# Altium PCB 2S3P-9V.PcbDoc
Units mm, origin at the board's own origin, x right, y up, seen from the top; angles counter-clockwise.
Board outline 74.99 x 72.5 mm, 2 copper layers (Top Layer, Bottom Layer); 8 components, 8 nets, 48 pads, 0 vias.
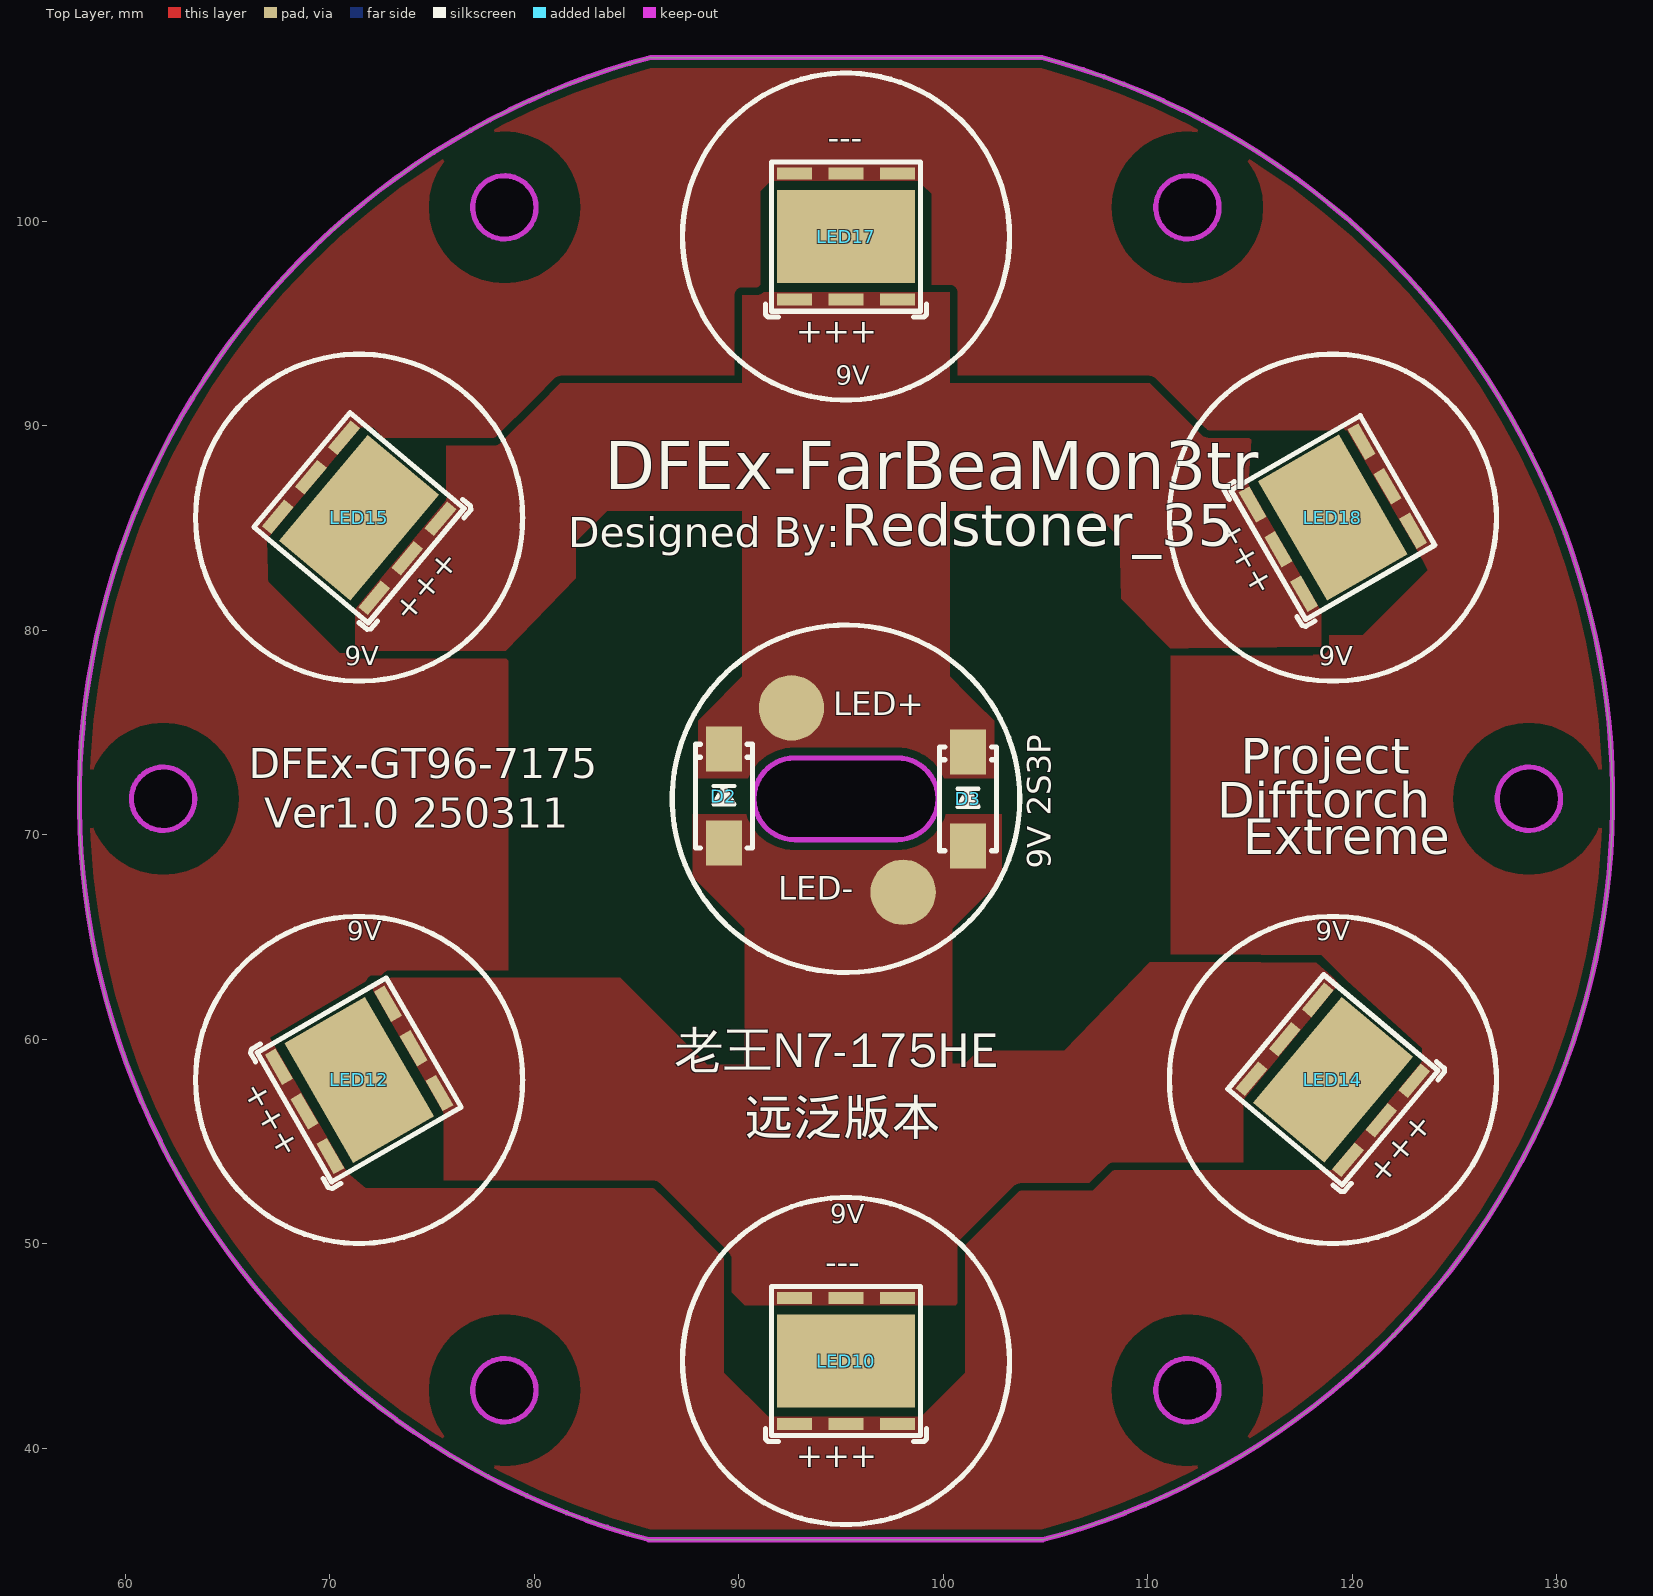
[diagram p0: Top Layer view]
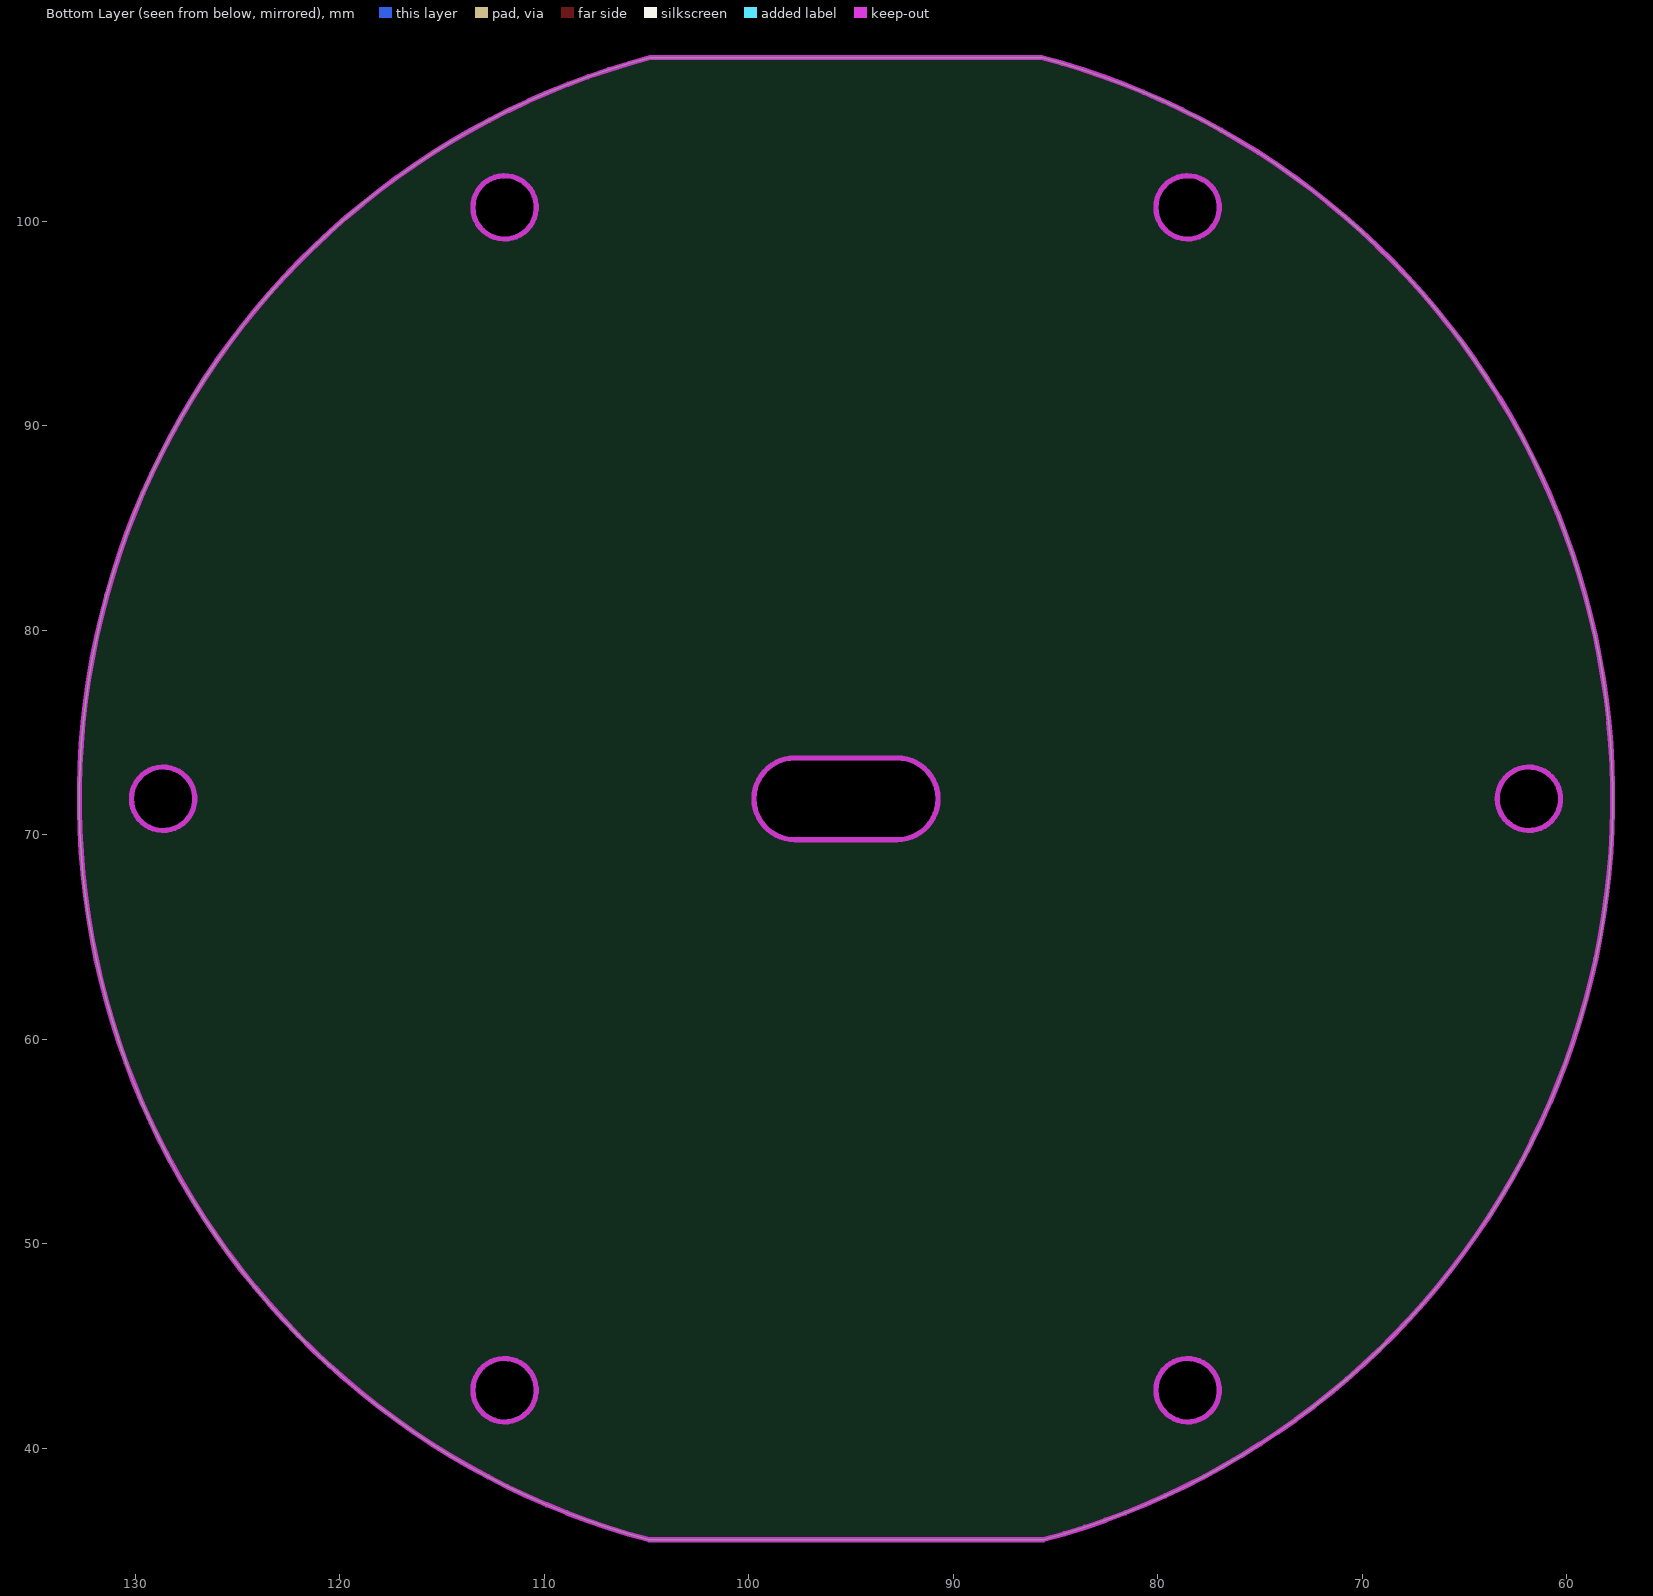
[diagram p1: Bottom Layer view, seen from below]

## Layer stack, top to bottom
Top Solder: solder mask 0.0102, Solder Resist, Dk 3.5
Top Layer: signal copper 0.0356
Dielectric 1: dielectric 0.32, FR-4, Dk 4.8
Bottom Layer: signal copper 0.0356
Bottom Solder: solder mask 0.0102, Solder Resist, Dk 3.5

## Board outline
85.597,35.519 cw(c95.25,71.755) 85.7,108.019 85.7,108.01 104.832,108.01 cw(c95.25,71.755) 104.888,35.515
cut-out: 92.75,69.755 97.75,69.755 ccw(c97.75,71.755) 97.75,73.755 92.75,73.755 ccw(c92.75,71.755)
cut-out: 61.848,70.205 cw(c61.848,71.755) 60.298,71.755 cw(c61.848,71.755) 61.848,73.305 cw(c61.848,71.755) 63.398,71.755 cw(c61.848,71.755)
cut-out: 78.549,99.132 cw(c78.549,100.682) 76.999,100.682 cw(c78.549,100.682) 78.549,102.232 cw(c78.549,100.682) 80.099,100.682 cw(c78.549,100.682)
cut-out: 110.401,100.682 ccw(c111.951,100.682) 111.951,99.132 ccw(c111.951,100.682) 113.501,100.682 ccw(c111.951,100.682) 111.951,102.232 ccw(c111.951,100.682)
cut-out: 127.102,71.755 ccw(c128.652,71.755) 128.652,70.205 ccw(c128.652,71.755) 130.202,71.755 ccw(c128.652,71.755) 128.652,73.305 ccw(c128.652,71.755)
cut-out: 110.401,42.828 ccw(c111.951,42.828) 111.951,41.278 ccw(c111.951,42.828) 113.501,42.828 ccw(c111.951,42.828) 111.951,44.378 ccw(c111.951,42.828)
cut-out: 76.999,42.828 cw(c78.549,42.828) 78.549,44.378 cw(c78.549,42.828) 80.099,42.828 cw(c78.549,42.828) 78.549,41.278 cw(c78.549,42.828)

## Design rules (kind name [scope] priority, off if disabled: settings)
Clearance [All] p1: gap=0.381
PolygonConnect [All] p1: connectstyle=Direct reliefconductorwidth=0.254 reliefentries=4 polygonreliefangle="90 Angle" airgapwidth=0.254
RoutingVias [All] p1: holewidth=0.711 width=1.27 viastyle="Through Hole" minholewidth=0.711 minwidth=1.27 maxholewidth=0.711 maxwidth=1.27
SolderMaskExpansion [All] p1: expansion=0.102
Width [All] p1: maxlimit=0.254 minlimit=0.254 preferedwidth=0.254
30 further rules are at their usual default settings.

## Components (designator, comment, footprint, x,y, rotation, side; value= is the part's Value field where it differs from the comment)
D2 "SB2060L" SMA 89.281,71.882 r90 top
D3 "SB2060L" SMA 101.219,71.755 r90 top
LED10 "FV7012I" N7175HE 95.25,44.255 r180 top
LED12 "FV7012I" N7175HE 71.434,58.005 r120 top
LED14 "FV7012I" N7175HE 119.066,58.005 r230 top
LED15 "FV7012I" N7175HE 71.434,85.505 r230 top
LED17 "FV7012I" N7175HE 95.25,99.255 r180 top
LED18 "FV7012I" N7175HE 119.066,85.505 r120 top

## Footprints (in the part's own frame and the unit in brackets; to place one, negate y for a bottom-side part, rotate by r counter-clockwise, add the part's x,y. Pads: shape width x height; smd on the part's side, far side on the other; paste and mask are expansions set on the pad)
N7175HE [mm] "夜巡老王N7-175HE灯珠（达立半导体A6-N60）"
  rect 6.76x4.56 smd mask+0.03: 0(0,0)
  rect 1.72x0.6 smd mask+0.03: W1N(-2.52,-3.08) W1P(-2.52,3.08) W2N(0,-3.08) W2P(0,3.08) W3N(2.52,-3.08) W3P(2.52,3.08)
  silkscreen extent -3.94,-3.65 3.94,3.94, body extent -3.68,-3.68 3.68,3.68, height 0.7
SMA [mm] "4.5x2.6*2.2mm（长宽高，不包括引脚）"
  rect 2.2x1.75 smd: 1(-2.3,0) 2(2.3,0)
  silkscreen extent -2.54,-1.4 2.54,1.4, body extent -2.53,-1.3 2.58,1.3, height 2.15

## Free pads (board coordinates)
  round 3.2 smd mask+0.03: 1(92.583,76.2) 2(98.044,67.183)

## Nets (pads, with @x,y where several pads share a name; then routed paths per layer and width w, separated by ;. In a path a pad name is that pad's centre, name@x,y a point inside that pad or via, vN(x,y) a via of type N, cw(c..) or ccw(c..) an arc to the next point about the centre after c; other vN are vias at no path point)
LED1P_6V: LED10.W1P LED10.W2P LED10.W3P LED12.W1P LED12.W2P LED12.W3P LED14.W1P LED14.W2P LED14.W3P LED15.W1N LED15.W2N LED15.W3N LED17.W1N LED17.W2N LED17.W3N LED18.W1N LED18.W2N LED18.W3N
LED1P_12V: 
LED2P_6V: 
LED2P_12V: 
LED+: D2.2 D3.2 LED15.W1P LED15.W2P LED15.W3P LED17.W1P LED17.W2P LED17.W3P LED18.W1P LED18.W2P LED18.W3P pad.1
LED-: D2.1 D3.1 LED10.W1N LED10.W2N LED10.W3N LED12.W1N LED12.W2N LED12.W3N LED14.W1N LED14.W2N LED14.W3N pad.2
NTC+: 
NTC-: 
pads on no net: LED10.0 LED12.0 LED14.0 LED15.0 LED17.0 LED18.0

## Polygon pours and split planes (outlines as drawn)
LED- on Top Layer "Component Side-No Net 1" (solid, remove dead copper, pour order 37): 87.757,70.993 102.87,70.993 102.87,67.818 100.457,65.405 92.075,65.405 90.297,65.405 87.757,67.945 87.757,69.342
LED+ on Top Layer "Component Side-No Net 1" (solid, remove dead copper, pour order 35): 98.848,74.083 98.848,72.983 98.933,72.898 99.06,72.771 102.489,72.771 102.489,75.565 101.6,76.454 99.949,78.105 97.028,78.105 90.551,78.105 88.011,75.565 88.011,72.771 98.044,72.771 98.425,73.152
LED1P_6V on Top Layer "Component Side-No Net 1" (solid, remove dead copper, pour order 16): 66.675,82.677 69.723,79.629 71.501,77.851 73.406,75.946 73.406,71.173 73.406,69.342 67.056,60.071 68.072,58.039 60.706,58.674 60.706,77.978 60.452,78.232 60.452,79.121 60.706,79.375
LED1P_6V on Top Layer "Component Side-No Net 1" (solid, remove dead copper, pour order 14): 119.761,89.789 112.395,89.789 105.791,96.393 105.664,96.52 101.219,96.52 99.822,96.52 99.441,96.901 99.441,100.965 99.441,101.346 98.806,101.981 96.901,101.981 91.567,101.981 91.186,101.6 91.059,101.473 91.059,98.425 91.059,96.901 90.551,96.393 85.598,96.393 85.344,96.393 78.359,89.408 72.898,89.408 72.644,89.408 72.136,89.916 71.501,89.916 66.929,84.455 67.056,79.629 67.056,79.502 69.723,76.835 73.406,73.152 73.406,66.802 73.406,66.294 72.517,65.405 71.882,64.77 54.864,64.77 54.864,100.711 53.975,101.6 67.437,115.062 67.437,115.443 101.727,115.443 102.743,116.459 106.68,112.522 128.397,112.522 132.461,112.522 140.97,104.013 141.986,102.997 141.986,82.042 141.986,76.073 141.732,75.819 140.843,74.93 128.905,74.93 128.143,74.93 123.317,83.693
LED1P_6V on Top Layer "Component Side-No Net 1" (solid, remove dead copper, pour order 15): 123.698,82.931 113.284,72.517 113.284,67.691 113.284,66.421 115.062,64.643 115.57,64.135 117.856,64.135 118.491,64.135 119.761,62.865 123.444,59.563 123.444,58.928 118.999,53.594 108.331,53.594 107.315,52.578 104.648,52.578 103.759,52.578 101.727,50.546 101.092,49.911 101.092,45.466 101.092,43.688 99.568,42.164 98.933,41.529 91.44,41.529 89.281,43.688 89.281,48.26 89.281,49.276 85.852,52.705 71.755,52.705 70.866,53.467 67.056,60.071 72.263,63.119 72.517,63.119 73.406,64.008 73.406,66.294 73.406,66.929 72.39,67.945 71.882,67.437 53.594,67.437 53.594,33.401 52.959,32.766 61.722,24.003 104.902,24.003 141.605,24.003 144.399,26.797 149.86,32.258 149.86,88.519
LED+ on Top Layer "Component Side-No Net 1" (solid, remove dead copper, pour order 18): 93.091,73.755 93.177,73.669 98.331,73.669 98.434,73.669 100.33,75.565 100.33,89.154 100.33,96.52 94.869,96.52 90.17,96.52 90.17,87.63 90.17,75.668 92.169,73.669
LED+ on Top Layer "Component Side-No Net 1" (solid, remove dead copper, pour order 20): 71.247,81.026 75.692,86.36 75.692,89.408 78.064,89.408 80.731,92.075 90.932,92.075 90.932,91.44 90.932,85.852 83.566,85.852 82.042,84.328 82.042,82.55 78.613,78.994 71.247,78.994
LED+ on Top Layer "Component Side-No Net 1" (solid, remove dead copper, pour order 19): 118.491,80.899 114.935,87.122 115.083,89.662 112.627,89.598 110.15,92.075 99.759,92.075 99.759,91.63 99.759,85.852 107.315,85.852 108.648,84.519 108.712,81.534 111.125,79.121 118.491,79.184
LED- on Top Layer "Component Side-No Net 1" (solid, remove dead copper, pour order 17): 97.536,69.755 97.45,69.841 92.296,69.841 92.193,69.841 90.297,67.945 90.297,54.356 90.297,46.99 95.758,46.99 100.457,46.99 100.457,55.88 100.457,67.842 98.458,69.841
LED- on Top Layer "Component Side-No Net 1" (solid, remove dead copper, pour order 22): 90.297,46.99 89.281,48.006 89.281,49.276 85.852,52.705 76.962,52.705 76.2,52.705 75.565,52.705 75.565,56.388 72.136,62.357 72.136,62.992 73.787,62.992 83.439,62.992 84.201,62.992 88.456,58.737 91.376,58.737 92.075,58.039 92.71,57.404 92.71,46.99
LED- on Top Layer "Component Side-No Net 1" (solid, remove dead copper, pour order 21): 100.457,46.99 104.902,46.863 106.299,47.879 107.696,49.403 113.284,53.467 114.046,53.467 114.681,53.467 114.681,57.023 119.38,62.738 118.237,63.754 116.459,63.754 110.109,63.754 105.918,59.436 101.727,59.436 101.092,58.801 98.171,58.801 97.536,58.166 97.536,46.99
LED1P_6V on Top Layer "Component Side-No Net 1" (solid, pour order 23): 70.231,78.867 78.613,78.867 78.74,78.74 78.74,74.549 78.74,62.992 78.359,62.611 77.851,63.119 70.739,63.119 70.231,63.119 69.596,62.484 69.469,62.611 66.802,62.611 66.802,79.136 67.112,79.446
LED1P_6V on Top Layer "Component Side-No Net 1" (solid, pour order 24): 115.57,64.135 111.125,64.135 111.125,78.74 119.761,78.74 120.015,78.994 122.301,78.994 120.904,77.597 120.904,64.135
LED1P_6V on Top Layer "Component Side-No Net 1" (solid, remove dead copper, pour order 25): 112.944,89.789 101.6,89.789 100.076,91.313 99.568,91.821 99.568,98.298 99.568,101.219 98.956,101.831 98.679,102.108 98.044,102.108 91.186,102.108 90.551,101.473 90.678,101.346 90.678,94.107 90.678,90.678 90.297,90.297 90.17,90.17 85.471,90.17 81.153,90.17 80.899,90.424 79.883,91.44 79.883,97.663 79.883,104.871 81.754,106.742 82.197,106.299 104.14,106.299 112.268,106.299 112.776,106.807 114.3,108.331 114.3,108.585
LED1P_6V on Top Layer "Component Side-No Net 1" (solid, remove dead copper, pour order 26): 123.698,82.931 123.698,79.756 118.11,79.756 118.11,75.184 118.11,75.057 124.714,75.057 126.238,75.057 126.238,78.486 126.238,86.614 125.857,86.614 122.301,86.614 122.301,85.852

## Keep-outs
Keep-Out Layer:
  circle w0.254: c111.951,100.682 r1.55
  circle w0.254: c78.541,100.682 r1.55
  circle w0.254: c61.848,71.755 r1.55
  circle w0.254: c78.541,42.828 r1.55
  circle w0.254: c111.951,42.828 r1.55
  circle w0.254: c128.652,71.755 r1.55
  lines w0.254: 85.597,35.515 104.888,35.515 ccw(c95.25,71.755) 104.832,108.01 85.7,108.01 ; 85.597,35.519 cw(c95.25,71.755) 85.7,108.019 ; 92.75,69.755 cw(c92.75,71.755) 92.75,73.755 97.75,73.755 cw(c97.75,71.755) 97.75,69.755 92.75,69.755

## Silkscreen, mask and mechanical layers (free items; w line width, h text height)
Top Overlay:
  circle w0.254: c95.25,99.255 r8
  circle w0.254: c119.066,85.505 r8
  circle w0.254: c119.066,58.005 r8
  circle w0.254: c95.25,44.255 r8
  circle w0.254: c71.434,58.005 r8
  circle w0.254: c71.434,85.505 r8
  circle w0.254: c95.25,71.755 r8.5
  text "---" at 94.361,103.124 h2
  text "9V" at 94.742,91.694 h1.6
  text "DFEx-FarBeaMon3tr" at 83.439,86.106 h4
  text "Designed By:" at 81.661,83.566 h2.5
  text "Redstoner_35" at 94.996,83.439 h3.5
  text "9V" at 70.739,77.978 h1.6
  text "9V" at 118.364,77.978 h1.6
  text "LED+" at 94.615,75.438 h2
  text "Project" at 114.554,72.39 h3
  text "DFEx-GT96-7175" at 66.04,72.263 h2.5
  text "Difftorch" at 113.411,70.231 h3
  text "Ver1.0 250311" at 66.802,69.85 h2.5
  text "Extreme" at 114.681,68.453 h3
  text "9V 2S3P" at 105.664,68.326 h2 r90
  text "LED-" at 91.948,66.421 h2
  text "9V" at 70.866,64.516 h1.6
  text "9V" at 118.237,64.516 h1.6
  text "老王N7-175HE" at 86.868,58.039 h3
  text "远泛版本" at 90.297,54.737 h3
  text "9V" at 94.488,50.673 h1.6
  text "---" at 94.234,48.133 h2
Top Solder:
  lines w2: 76.835,49.149 82.804,49.149 84.963,46.99 84.963,38.862 ; 78.105,93.472 79.375,94.742 82.931,94.742 85.471,97.282 85.471,105.283 ; 105.283,104.394 105.283,97.79 107.95,95.123 113.792,95.123 114.554,94.361 ; 105.664,38.735 105.664,46.355 108.839,49.53 112.649,49.53 113.411,49.53
Mechanical 1:
  circle w0.254: c111.951,100.682 r3.2
  circle w0.254: c128.652,71.755 r3.2
  circle w0.254: c111.951,42.828 r3.2
  circle w0.254: c78.549,42.828 r3.2
  circle w0.254: c61.848,71.755 r3.2
  circle w0.254: c78.549,100.682 r3.2

## Text inside footprints (layer, text, board x,y; h text height)
LED10: Top Overlay "+++" at 96.774,40.445 h2 r180
LED12: Top Overlay "+++" at 68.897,54.78 h2 r120
LED14: Top Overlay "+++" at 122.964,56.723 h2 r230
LED15: Top Overlay "+++" at 75.333,84.223 h2 r230
LED17: Top Overlay "+++" at 96.774,95.445 h2 r180
LED18: Top Overlay "+++" at 116.528,82.28 h2 r120